# EAGLE board Danger Detection Device (EAGLE 9.7.0)

Size 182.8 x 112.58 mm. Coordinates in mm from the lower left corner, seen from the top.
Outline: 0,0 182.8,0 182.8,112.58 0,112.58 0,0
Copper layers (1*16): Top 0.035mm / dielectric 1.5mm / Bottom 0.035mm
Design rules "default": minimum track width 6mil, minimum drill 0.35mm, track to track 6mil, track to pad 6mil, pad to pad 6mil, via to via 6mil, smd to smd 6mil, copper to edge 40mil, drill to drill 6mil, minimum pad ring 10mil, minimum via ring 8mil, stop-mask expansion 4mil, vias tented up to drill 0mil, thermal gap 10mil

## Footprints (pad centres in the part's own frame; a part is rotated, then mirrored left to right if it is on the bottom)
LEDRD254W60D565H860B = drill 0.981 pad 1.581: 1 -1.27,0; 2 1.27,0
LEDRD254W60D565H860B_G = drill 0.981 pad 1.581: 1 -1.27,0; 2 1.27,0
PIEZO = drill 1 pad 1.6: 1 -3.5,0; 2 3.5,0
RESAD1016W63L850D250B = drill 0.83 pad 1.43: 1 -5.08,0; 2 5.08,0
HA-06-SM065 = drill 1 pad 1.676: 1 -2.54,-2.54; 2 0,2.54; 3 2.54,-2.54
SWITCH-MOMENTARY-PTH-6.5MM = drill 1.016 pad 1.88: 1 -3.251,2.261; 2 3.251,2.261; 3 -3.251,-2.261; 4 3.251,-2.261
DIP826W53P254L959H508Q8B = drill 0.786 pad 1.386: 1 -4.13,3.81; 2 -4.13,1.27; 3 -4.13,-1.27; 4 -4.13,-3.81; 5 4.13,-3.81; 6 4.13,-1.27; 7 4.13,1.27; 8 4.13,3.81
TO92 = drill 0.813 octagon: 1 -1.27,0; 2 0,1.905; 3 1.27,0
ARDUINO-UNO-R3-SHIELD = drill 1.016 pad 1.88: 3.3V 24.13,-2.54; 5V 24.13,0; A0 24.13,12.7; A1 24.13,15.24; A2 24.13,17.78; A3 24.13,20.32; A4 24.13,22.86; A5 24.13,25.4; AREF -24.13,-13.97; D2 -24.13,20.32; D3 -24.13,17.78; D4 -24.13,15.24; D5 -24.13,12.7; D6 -24.13,10.16; D7 -24.13,7.62; D8 -24.13,3.81; D9 -24.13,1.27; D10 -24.13,-1.27; D11 -24.13,-3.81; D12 -24.13,-6.35; D13 -24.13,-8.89; GND@0 24.13,2.54; GND@1 24.13,5.08; GND@2 -24.13,-11.43; IOREF 24.13,-7.62; NC 24.13,-10.16; RES 24.13,-5.08; RX -24.13,25.4; SCL -24.13,-19.05; SDA -24.13,-16.51; TX -24.13,22.86; VIN 24.13,7.62

## Placement (x,y rotation side)
D1  RED  [LEDRD254W60D565H860B]  176.74,70.89 180 top
D2  GREEN  [LEDRD254W60D565H860B_G]  138.64,70.89 0 top
PIEZO1  PIEZO  [PIEZO]  129.77,16.26 90 top
R1  10k  [RESAD1016W63L850D250B]  165.33,45.47 90 top
R2  10k  [RESAD1016W63L850D250B]  152.63,45.47 90 top
R3  10k  [RESAD1016W63L850D250B]  147.55,29.55 60 top
RPOT1  250k  [HA-06-SM065]  40.87,22.61 0 top
S1  SWITCH_MOMENTARY  [SWITCH-MOMENTARY-PTH-6.5MM]  147.55,16.26 90 top
U1  LM393_DIP  [DIP826W53P254L959H508Q8B]  92.94,16.26 90 top
U2  TMP36GT9Z_TO92  [TO92]  71.35,4.83 0 top
U3  ARDUINO-UNO-R3-SHIELD  [ARDUINO-UNO-R3-SHIELD]  47.88,82.73 270 top

## Library data of the parts
D1 = Tinkercad; CATEGORY: Opto-Electronic; SUB-CATEGORY: LED; VALUE: LED_RED
D2 = Tinkercad; CATEGORY: Opto-Electronic; SUB-CATEGORY: LED; VALUE: LED_GREEN
PIEZO1 R1-R3 RPOT1 S1 U1-U3 = Tinkercad

## Nets
D1_C: D1.2 R1.2
D2_C: D2.2 R2.2
U1_+IN1: RPOT1.2 U1.3
U1_OUT1: PIEZO1.2 U1.1
U2_VOUT: U1.2 U2.2
U3_5V: PIEZO1.1 RPOT1.3 S1.3 S1.4 U1.8 U2.3 U3.5V
U3_D2: R3.1 S1.1 S1.2 U3.D2
U3_D4: D2.1 U3.D4
U3_D5: D1.1 U3.D5
U3_GND: R1.1 R2.1 R3.2 RPOT1.1 U1.4 U2.1 U3.GND@0 U3.GND@1 U3.GND@2

## Tracks (layer width: path | path; a pad name or v marks a point on that pad's centre or on a via)
D1_C  (1 unrouted)
D2_C  (1 unrouted)
U1_+IN1  (1 unrouted)
U1_OUT1  (1 unrouted)
U2_VOUT  (1 unrouted)
U3_5V  (6 unrouted)
U3_D2  (3 unrouted)
U3_D4  (1 unrouted)
U3_D5  (1 unrouted)
U3_GND  (8 unrouted)